# Altium PCB Leningrad_modify.PcbDoc (part 4 of 4)
Units mil, origin at the board's own origin, x right, y up, seen from the top; angles counter-clockwise.
Board outline 10000 x 7310 mil, 2 copper layers (Top Layer, Bottom Layer); 250 components, 267 nets, 1381 pads, 472 vias.
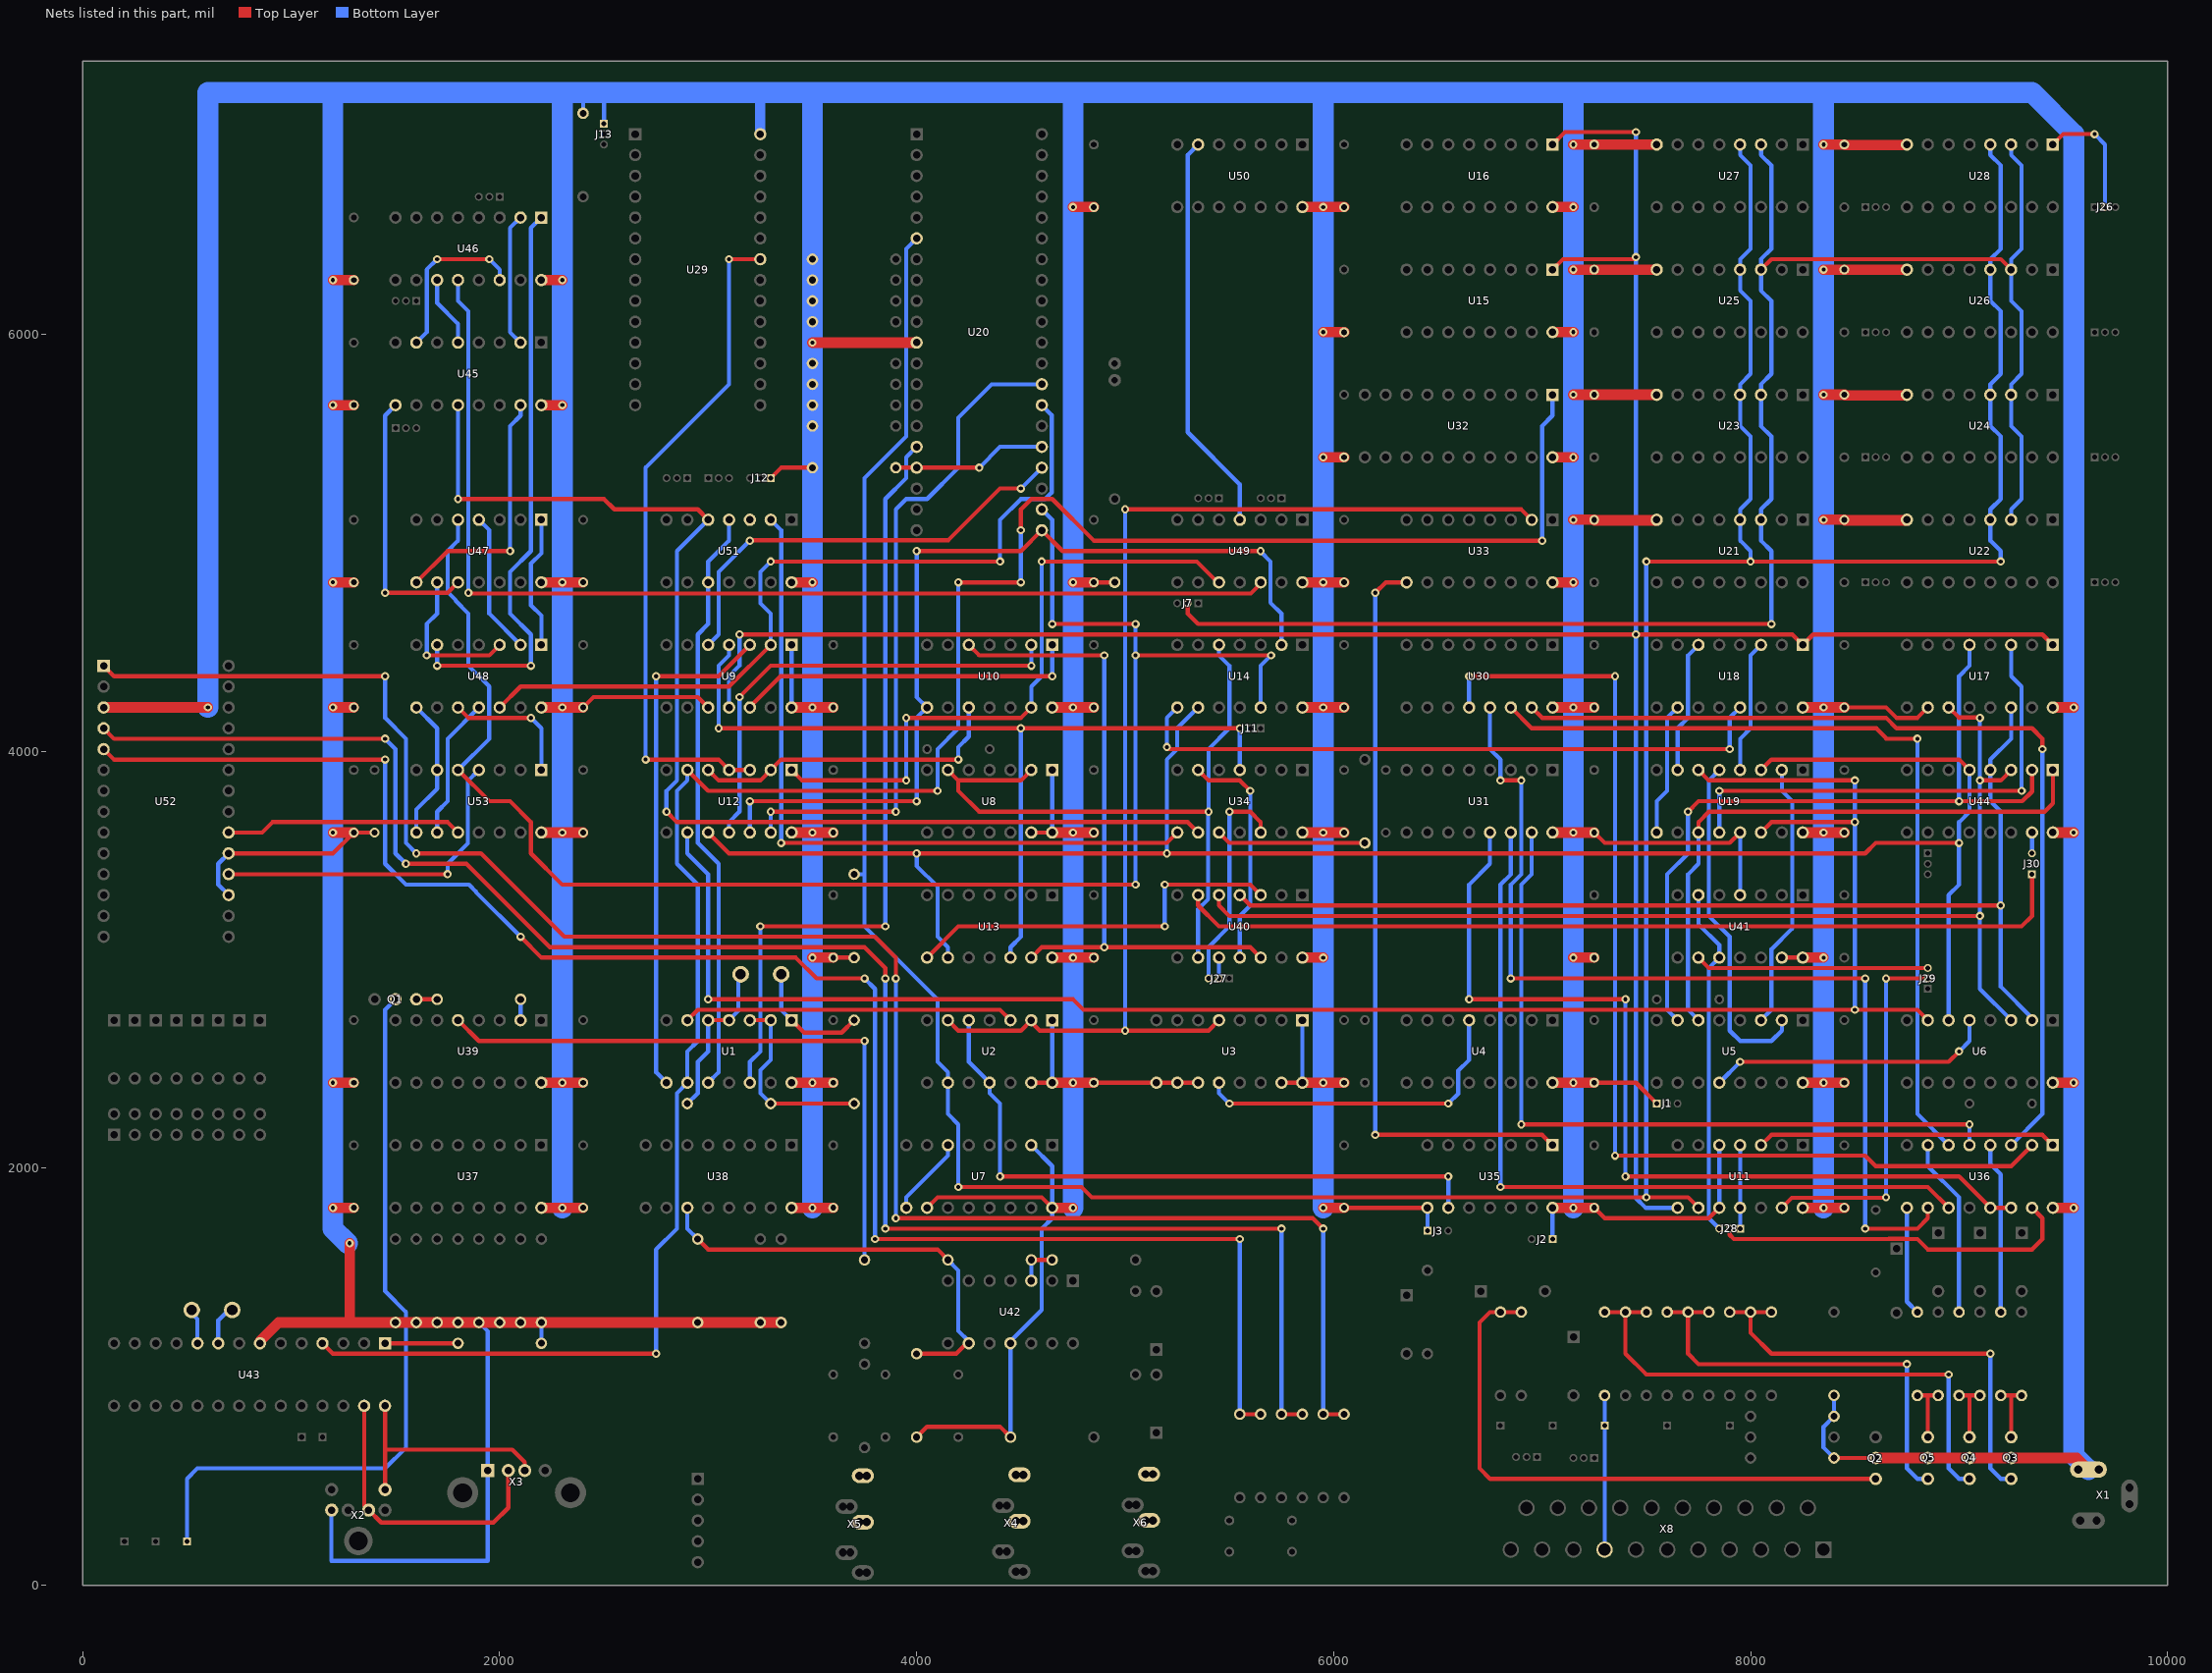
[diagram p3: the nets of this part, all layers, seen from the top]

## Via types
v1: diameter 39.37, hole 19.68, Top Layer to Bottom Layer, tented both sides, 472 vias

## Nets (pads, with @x,y where several pads share a name; then routed paths per layer and width w, separated by ;. In a path a pad name is that pad's centre, name@x,y a point inside that pad or via, vN(x,y) a via of type N, cw(c..) or ccw(c..) an arc to the next point about the centre after c; other vN are vias at no path point) (continued)
NetJ26_2: J26.2 U28.1 | length 601.4
  Top Layer w20: U28.1@9460,6910 U28.1@9450,6910 9500,6960 v1(9650,6960)
  Bottom Layer w20: v1(9650,6960) 9700,6910 J26.2@9700,6610
NetJ27_2: J27.2 U40.10 | length 100
  Bottom Layer w20: J27.2@5450,2910 U40.10@5450,3010
NetJ27_3: J27.3 U34.12 | length 1062.1
  Top Layer w20: v1(5500,3710) 5600,3710 5650,3660 U34.12@5650,3610
  Bottom Layer w20: J27.3@5400,2910 5400,3060 5500,3160 v1(5500,3710)
NetJ28_1: J28.1 U11.4 U11.11 | length 400
  Bottom Layer w20: J28.1@7950,1710 U11.11@7950,1810 U11.4@7950,2110
NetJ28_2: J28.2 U36.15 | length 1751.3
  Top Layer w20: J28.2@7900,1710 7900,1680 7920,1660 8661.95,1660 8663.02,1661.07 8736.98,1661.07 8738.05,1660 8800,1660 8850,1610 9350,1610 9400,1660 9400,1760 U36.15@9350,1810
NetJ28_3: J28.3 U41.6 U41.10 | length 1682.8
  Bottom Layer w20: U41.6@7750,3310 7750,3170 7850,3070 U41.10@7850,3010 7800,2960 7800,1760 J28.3@7850,1710
NetJ29_2: J29.2 U11.13 | length 1770.7
  Top Layer w20: U11.13@8150,1810 8197.53,1857.53 8647.53,1857.53 v1(8650,1860) ; v1(8650,2910) J29.2@8850,2910
  Bottom Layer w20: v1(8650,1860) v1(8650,2910)
NetJ29_3: J29.3 U41.9 | length 1120.7
  Top Layer w20: U41.9@7750,3010 7800,2960 J29.3@8850,2960
NetJ30_1: J30.1 U40.6 | length 4312.1
  Top Layer w20: U40.6@5350,3310 5350,3260 5450,3160 9300,3160 9350,3210 J30.1@9350,3410
NetJ30_3: J30.3 U44.15 | length 100
  Bottom Layer w20: J30.3@9350,3510 U44.15@9350,3610
NetQ1_2: Q1.2 SND.1 | length 3624.3
  Bottom Layer w20: SND.1@500,210 500,510 550,560 1450,560 1550,660 1550,1310 1450,1410 1450,2760 Q1.2@1500,2810
NetQ1_3: Q1.3 R24.2 | length 100
  Top Layer w20: Q1.3@1600,2810 R24.2@1700,2810
NetQ2_1: Q2.1 R13.1 R19.2 | length 2841.4
  Top Layer w20: R19.2@6900,1309.76 R13.1@6800,1309.76 6749.76,1309.76 6700,1260 6700,560 6750.24,509.76 Q2.1@8600,509.76
NetQ3_1: Q3.1 R10.1 R18.1 R20.2 | length 2161.9
  Top Layer w20: R10.1@7900,1309.76 R20.2@8000,1309.76 ; R18.1@8100,1309.76 R20.2@8000,1309.76 ; v1(9150,1110) 8100,1110 8000,1210 R20.2@8000,1309.76
  Bottom Layer w20: v1(9150,1110) 9150,560 9200,510 Q3.1@9250,510
NetQ3_3: Q3.3 R7.2 R54.2 | length 299.8
  Top Layer w20: R7.2@9200,909.76 9250,909.76 ; Q3.3@9250,710 9250,909.76 ; R54.2@9300,909.76 9250,909.76
NetQ4_1: Q4.1 R11.1 R17.1 R21.2 | length 2561.9
  Top Layer w20: R11.1@7300,1309.76 R21.2@7400,1309.76 ; R17.1@7500,1309.76 R21.2@7400,1309.76 ; v1(8950,1010) 7500,1010 7400,1110 R21.2@7400,1309.76
  Bottom Layer w20: v1(8950,1010) 8950,560 9000,510 Q4.1@9050,510
NetQ4_3: Q4.3 R8.2 R53.2 | length 299.8
  Top Layer w20: R8.2@9000,909.76 9050,909.76 ; Q4.3@9050,710 9050,909.76 ; R53.2@9100,909.76 9050,909.76
NetQ5_1: Q5.1 R12.1 R16.1 R22.2 | length 2091.2
  Top Layer w20: R12.1@7600,1309.76 R22.2@7700,1309.76 ; R16.1@7800,1309.76 R22.2@7700,1309.76 ; v1(8750,1060) 7750,1060 7700,1110 R22.2@7700,1309.76
  Bottom Layer w20: v1(8750,1060) 8750,560 8800,510 Q5.1@8850,510
NetQ5_3: Q5.3 R9.2 R55.2 | length 299.8
  Top Layer w20: R9.2@8800,909.76 8850,909.76 ; Q5.3@8850,710 8850,909.76 ; R55.2@8900,909.76 8850,909.76
NetR1_1: R1.1 U1.1 Y1.1 | length 590.4
  Top Layer w20: U1.1@3400,2710 3460,2650 3640,2650 R1.1@3700,2710
  Bottom Layer w20: Y1.1@3350,2930 3350,2760 U1.1@3400,2710
NetR1_2: R1.2 R2.1 U1.2 U1.3 | length 941.4
  Top Layer w20: U1.3@3200,2710 U1.2@3300,2710 ; R2.1@3300,2310 R1.2@3700,2310
  Bottom Layer w20: R2.1@3300,2310 3250,2360 3250,2470 3300,2520 U1.2@3300,2710
NetR2_2: R2.2 U1.4 U1.5 Y1.2 | length 784.6
  Top Layer w20: U1.5@3000,2710 U1.4@3100,2710
  Bottom Layer w20: R2.2@2900,2310 2950,2360 2950,2510 3000,2560 U1.5@3000,2710 ; U1.4@3100,2710 3145,2755 3145,2919 Y1.2@3156,2930
NetR6_1: R6.1 U20.17 U20.25 | length 741.4
  Top Layer w20: R6.1@3900,5360 U20.17@4000,5360 v1(4300,5360)
  Bottom Layer w20: v1(4300,5360) 4400,5460 U20.25@4600,5460
NetR7_1: R7.1 U36.4 | length 820.9
  Bottom Layer w20: U36.4@9150,2110 9150,2020 9200,1970 R7.1@9200,1309.76
NetR8_1: R8.1 U36.7 | length 862.4
  Bottom Layer w20: U36.7@8850,2110 8850,2010 9000,1860 R8.1@9000,1309.76
NetR9_1: R9.1 U36.9 | length 520.9
  Bottom Layer w20: U36.9@8750,1810 8750,1359.76 R9.1@8800,1309.76
NetR11_2: R11.2 R.1 X8.15 | length 739.8
  Bottom Layer w20: X8.15@7300,170 R.1@7300,765 R11.2@7300,909.76
NetR24_1: R24.1 U39.2 | length 100
  Bottom Layer w20: U39.2@2100,2710 R24.1@2100,2810
NetR25_2: R25.2 U34.10 | length 720.7
  Top Layer w20: U34.10@5450,3610 5500,3560 R25.2@6150,3560
NetR31_1: R31.1 U39.5 | length 3041.4
  Top Layer w20: U39.5@1800,2710 1900,2610 v1(3750,2610)
  Bottom Layer w20: R31.1@3750,1560 v1(3750,2610)
NetR45_1: R45.1 R51.2 U42.3 | length 190
  Top Layer w20: R51.2@4550,1560 R45.1@4650,1560
  Bottom Layer w20: U42.3@4550,1470 R51.2@4550,1560
NetR52_1: R52.1 U43.1 | length 350
  Top Layer w20: U43.1@1450,1160 R52.1@1800,1160
NetR57_1: R57.1 R58.1 U52.5 | length 8361.2
  Top Layer w20: U52.5@100,4010 150,3960 v1(1450,3960) ; v1(2100,3110) 2200,3010 3420,3010 3520,2910 v1(3750,2910) ; v1(3800,1660) v1(5550,1660) ; R57.1@5550,820 R58.1@5650,820
  Bottom Layer w20: v1(1450,3960) 1450,3460 1550,3360 1853.29,3360 1887.69,3325.61 1887.69,3322.31 v1(2100,3110) ; v1(3750,2910) 3800,2860 v1(3800,1660) ; R57.1@5550,820 v1(5550,1660)
NetR59_1: R59.1 R60.2 U52.4 | length 8659.2
  Top Layer w20: U52.4@100,4110 150,4060 v1(1450,4060) ; v1(1550,3460) 1840,3460 2240,3060 3750,3060 3850,2960 v1(3850,2910) ; v1(3850,1710) v1(5750,1710) ; R60.2@5750,820 R59.1@5850,820
  Bottom Layer w20: v1(1450,4060) 1500,4010 1500,3510 v1(1550,3460) ; v1(3850,1710) v1(3850,2910) ; R60.2@5750,820 v1(5750,1710)
NetR61_1: R61.1 R62.2 U52.1 | length 9100.7
  Top Layer w20: U52.1@100,4410 150,4360 v1(1450,4360) ; v1(1600,3510) 1910,3510 2310,3110 3800,3110 3900,3010 v1(3900,2910) ; v1(3900,1760) 5900,1760 v1(5950,1710) ; R61.1@5950,820 R62.2@6050,820
  Bottom Layer w20: v1(1450,4360) 1450,4160 1550,4060 1550,3560 v1(1600,3510) ; v1(3900,1760) v1(3900,2910) ; R61.1@5950,820 v1(5950,1710)
NetU1_6: U1.6 U2.3 | length 1591.4
  Top Layer w20: U1.6@2900,2710 2950,2760 4400,2760 U2.3@4450,2710
NetU1_8: U1.8 U9.3 | length 2482.8
  Top Layer w20: v1(2750,4360) 3050,4360 U9.3@3200,4510
  Bottom Layer w20: v1(2750,4360) 2750,2460 U1.8@2800,2410
NetU1_9: U1.9 U12.6 U32.1 U43.4 | length 10822.8
  Top Layer w20: U43.4@1150,1160 1200,1110 v1(2750,1110) ; U12.6@2900,3910 3000,3810 v1(4100,3810) ; v1(4200,4810) v1(4500,4810) ; v1(4500,5060) 4500,5160 4550,5210 4650,5210 4850,5010 v1(7000,5010)
  Bottom Layer w20: v1(2750,1110) 2750,1610 2850,1710 2850,2360 U1.9@2900,2410 2900,2560 2950,2610 2950,3360 2850,3460 2850,3810 2900,3860 U12.6@2900,3910 ; v1(4100,3810) 4100,4010 4200,4110 v1(4200,4810) ; v1(4500,4810) v1(4500,5060) ; v1(7000,5010) 7000,5560 7050,5610 U32.1@7050,5710
NetU1_10: U1.10 U51.4 U51.10 | length 2824.3
  Bottom Layer w20: U1.10@3000,2410 3050,2460 3050,3460 2950,3560 2950,4560 3000,4610 U51.10@3000,4810 3000,4910 3100,5010 U51.4@3100,5110
NetU1_12: U1.12 U20.16 | length 3732.8
  Top Layer w20: v1(3250,3160) v1(3850,3160)
  Bottom Layer w20: U1.12@3200,2410 3200,2510 3250,2560 v1(3250,3160) ; v1(3850,3160) 3850,5210 3950,5310 3950,5410 U20.16@4000,5460
NetU2_5: U2.5 U2.11 U35.9 | length 3112.1
  Top Layer w20: v1(4400,1960) v1(6550,1960)
  Bottom Layer w20: U2.5@4250,2710 4250,2510 U2.11@4350,2410 4350,2360 4400,2310 v1(4400,1960) ; U35.9@6550,1810 v1(6550,1960)
NetU3_12: U3.12 U4.5 | length 1612.1
  Top Layer w20: v1(5500,2310) v1(6550,2310)
  Bottom Layer w20: U3.12@5450,2410 5450,2360 v1(5500,2310) ; v1(6550,2310) 6597.53,2357.53 6597.53,2467.53 6650,2520 U4.5@6650,2710
NetU5_12: U5.12 U6.5 | length 1402.8
  Top Layer w20: v1(7950,2510) 8950,2510 v1(9000,2560)
  Bottom Layer w20: U5.12@7850,2420 U5.12@7850,2410 v1(7950,2510) v1@7940,2510 ; v1(9000,2560) 9050,2610 U6.5@9050,2710
NetU7_6: U7.6 U7.9 | length 382.8
  Bottom Layer w20: U7.9@3950,1810 3950,1860 4150,2060 U7.6@4150,2110
NetU8_2: U8.2 U8.6 U14.5 U40.9 | length 3315.7
  Top Layer w20: U8.6@4150,3910 4200,3860 ; U8.2@4550,3910 4500,3860 4200,3860 ; v1(5400,3710) 4300,3710 4200,3810 4200,3860
  Bottom Layer w20: U40.9@5350,3010 5350,3242.79 5397.53,3290.31 5397.53,3707.53 v1(5400,3710) 5400,4010 5500,4110 5500,4410 5450,4460 U14.5@5450,4510
NetU9_2: U9.2 U20.27 U48.12 | length 3906.6
  Top Layer w20: U48.12@2000,4210 2100,4310 3100,4310 U9.2@3300,4510 ; v1(3300,4910) v1(4400,4910)
  Bottom Layer w20: U9.2@3300,4510 3300,4660 3250,4710 3250,4860 v1(3300,4910) ; v1(4400,4910) 4400,5110 4500,5210 4617.21,5210 4647.53,5240.31 4647.53,5612.47 U20.27@4600,5660
NetU9_5: U9.5 U20.24 | length 2127.8
  Top Layer w20: v1(3200,5010) 3202.47,5012.47 4152.47,5012.47 4400,5260 v1(4500,5260)
  Bottom Layer w20: U9.5@3000,4510 3050,4560 3050,4860 v1(3200,5010) ; v1(4500,5260) U20.24@4600,5360
NetU9_12: U9.12 U10.1 | length 1664.1
  Top Layer w20: U9.12@3200,4210 3200,4213.29 3346.71,4360 v1(4650,4360)
  Bottom Layer w20: v1(4650,4360) U10.1@4650,4510
NetU10_2: U10.2 U12.11 | length 2232.8
  Top Layer w20: v1(3150,4260) 3300,4410 v1(4550,4410)
  Bottom Layer w20: U12.11@3100,3610 3100,3660 3150,3710 v1(3150,4260) ; v1(4550,4410) U10.2@4550,4510
NetU10_5: U10.5 U13.13 U40.12 | length 3212.1
  Top Layer w20: U10.5@4250,4510 4300,4460 v1(4900,4460) ; U13.13@4550,3010 4600,3060 v1(4900,3060) 5600,3060 U40.12@5650,3010
  Bottom Layer w20: v1(4900,3060) v1(4900,4460)
NetU10_10: U10.10 U12.2 U12.5 | length 1532.8
  Top Layer w20: U12.5@3000,3910 3050,3860 3250,3860 U12.2@3300,3910 3350,3960 v1(4200,3960)
  Bottom Layer w20: v1(4200,3960) 4200,4020 4250,4070 U10.10@4250,4210
NetU10_13: U10.13 U12.1 U49.10 | length 3106
  Top Layer w20: U12.1@3400,3910 3450,3860 v1(3950,3860) ; v1(3950,4160) 4500,4160 U10.13@4550,4210 ; v1(4600,4910) 5344.09,4910 U49.10@5450,4804.09
  Bottom Layer w20: v1(3950,3860) v1(3950,4160) ; U10.13@4550,4210 4550,4310 4600,4360 v1(4600,4910)
NetU11_3: U11.3 U36.1 | length 1441.4
  Top Layer w20: U11.3@8050,2110 8100,2160 9400,2160 U36.1@9450,2110
NetU12_3: U12.3 U12.4 U29.22 | length 3236.4
  Top Layer w20: v1(2700,3960) 3050,3960 U12.4@3100,3910 U12.3@3200,3910 ; v1(3100,6360) U29.22@3250,6360
  Bottom Layer w20: v1(2700,3960) 2700,5360 3100,5760 v1(3100,6360)
NetU12_13: U12.13 U20.28 | length 3239.1
  Top Layer w20: v1(3300,3710) v1(3900,3710)
  Bottom Layer w20: U12.13@3300,3610 v1(3300,3710) ; v1(3900,3710) 3900,5160 3950,5210 4050,5210 4200,5360 4200,5600 4360,5760 U20.28@4600,5760
NetU13_8: U13.8 U40.3 | length 1882.8
  Top Layer w20: U13.8@4050,3010 4200,3160 v1(5190,3160) ; v1(5190,3360) 5600,3360 U40.3@5650,3310
  Bottom Layer w20: v1(5190,3160) v1(5190,3360)
NetU14_8: U14.8 U18.13 | length 3135.6
  Top Layer w20: v1(5200,4020) 5210,4010 v1(7900,4010)
  Bottom Layer w20: v1(5200,4020) 5200,4160 U14.8@5250,4210 ; v1(7900,4010) 7900,4160 U18.13@7950,4210
NetU17_3: U17.3 U19.12 | length 2370.7
  Top Layer w20: v1(7850,3810) v1(9300,3810)
  Bottom Layer w20: U19.12@7850,3610 v1(7850,3810) ; U17.3@9250,4510 9250,4360 9300,4310 v1(9300,3810)
NetU18_3: U18.3 U19.4 | length 641.4
  Bottom Layer w20: U19.4@7950,3910 7950,4060 8000,4110 8000,4460 U18.3@8050,4510
NetU18_6: U18.6 U19.7 | length 641.4
  Bottom Layer w20: U19.7@7650,3910 7650,4110 7700,4160 7700,4460 U18.6@7750,4510
NetU18_10: U18.10 U19.9 | length 641.4
  Bottom Layer w20: U19.9@7550,3610 7550,3760 7600,3810 7600,4160 U18.10@7650,4210
NetU30_12: U30.12 U36.2 | length 5212.1
  Top Layer w20: v1(6650,4360) v1(7350,4360) ; v1(7350,2060) 8550,2060 8600,2010 9250,2010 U36.2@9350,2110
  Bottom Layer w20: U30.12@6650,4210 v1(6650,4360) ; v1(7350,2060) v1(7350,4360)
NetU30_13: U30.13 U36.10 | length 4712.1
  Top Layer w20: v1(6800,3860) v1(6900,3860) ; v1(6850,2910) v1(8550,2910) ; v1(8550,1710) 8800,1710 8850,1760 U36.10@8850,1810
  Bottom Layer w20: U30.13@6750,4210 6750,4010 6800,3960 v1(6800,3860) ; v1(6850,2910) 6850,3360 6900,3410 v1(6900,3860) ; v1(8550,1710) v1(8550,2910)
NetU30_14: U30.14 U36.6 | length 4026.2
  Top Layer w20: U30.14@6850,4210 6950,4110 8603.29,4110 8650,4063.29 8650,4060 v1(8800,4060)
  Bottom Layer w20: v1(8800,4060) 8800,2260 U36.6@8950,2110
NetU30_15: U30.15 U36.3 | length 4524.3
  Top Layer w20: U30.15@6950,4210 7000,4160 8650,4160 8700,4110 9350,4110 9400,4060 v1(9400,4010)
  Bottom Layer w20: U36.3@9250,2110 9400,2260 v1(9400,4010)
NetU31_13: U31.13 U36.13 U36.14 | length 4353.6
  Top Layer w20: v1(6650,2810) v1(7400,2810) ; v1(7400,1960) 9000,1960 U36.13@9150,1810 U36.14@9250,1810
  Bottom Layer w20: v1(6650,2810) 6650,3360 6750,3460 U31.13@6750,3610 ; v1(7400,1960) v1(7400,2810)
NetU31_14: U31.14 U36.11 | length 3912.1
  Top Layer w20: v1(6800,1910) 8850,1910 U36.11@8950,1810
  Bottom Layer w20: v1(6800,1910) 6800,3360 6850,3410 U31.14@6850,3610
NetU31_15: U31.15 U36.5 | length 3670.7
  Top Layer w20: v1(6900,2210) v1(9050,2210)
  Bottom Layer w20: v1(6900,2210) 6900,3360 6950,3410 U31.15@6950,3610 ; U36.5@9050,2110 v1(9050,2210)
NetU33_9: U33.9 U35.1 | length 3641.3
  Top Layer w20: v1(6200,2160) 7000,2160 U35.1@7050,2110 ; v1(6200,4760) 6249.76,4809.76 U33.9@6350,4809.76
  Bottom Layer w20: v1(6200,2160) v1(6200,4760)
NetU34_6: U34.6 U40.11 | length 1112.1
  Top Layer w20: U34.6@5350,3910 5400,3860 5550,3860 v1(5600,3810)
  Bottom Layer w20: U40.11@5550,3010 5550,3210 5600,3260 v1(5600,3810)
NetU34_8: U34.8 U51.2 | length 3491.4
  Top Layer w20: v1(3350,3560) 5200,3560 U34.8@5250,3610
  Bottom Layer w20: U51.2@3300,5110 3350,5060 v1(3350,3560)
NetU34_9: U34.9 U45.12 U51.5 | length 5765.7
  Top Layer w20: v1(1800,5210) 2500,5210 2550,5160 2950,5160 U51.5@3000,5110 ; v1(2800,3710) 2850,3660 5300,3660 U34.9@5350,3610
  Bottom Layer w20: v1(1800,5210) U45.12@1800,5660 ; v1(2800,3710) 2800,3810 2850,3860 2850,4960 U51.5@3000,5110
NetU43_9: U43.9 Y2.1 | length 170.7
  Bottom Layer w20: U43.9@650,1170 650,1270 Y2.1@700,1320
NetU43_10: U43.10 Y2.2 | length 168.2
  Bottom Layer w20: Y2.2@506,1320 550,1276 U43.10@550,1170
NetU43_27: U43.27 X2.1 X3.2 | length 1443.2
  Top Layer w20: U43.27@1350,860 1350,381.26 X2.1@1371.26,360 1431.26,300 1970,300 2041.26,371.26 X3.2@2041.26,550 X3.2@2041.26,561.26
  Bottom Layer w20: U43.27@1350,860 U43.27@1350,880
NetU43_28: U43.28 X2.5 X3.3 | length 1156.4
  Top Layer w20: X2.5@1450,458.43 1450,650 ; U43.28@1450,860 1450,650 ; X3.3@2130,550 X3.3@2120,550 2120,590 2060,650 1450,650
  Bottom Layer w20: U43.28@1450,870 U43.28@1450,880
NetU45_2: U45.2 U46.2 | length 641.4
  Bottom Layer w20: U45.2@2100,5960 2050,6010 2050,6510 U46.2@2100,6560
NetU45_5: U45.5 U46.11 | length 341.4
  Bottom Layer w20: U46.11@1700,6260 1700,6150 1800,6050 U45.5@1800,5960
NetU45_7: U45.7 U46.14 | length 812.1
  Top Layer w20: v1(1700,6360) v1(1950,6360)
  Bottom Layer w20: U45.7@1600,5960 1650,6010 1650,6310 v1(1700,6360) ; v1(1950,6360) 2000,6310 U46.14@2000,6260
NetU45_9: U45.9 U47.10 | length 1291.4
  Top Layer w20: v1(1450,4760) 1750,4760 U47.10@1800,4810
  Bottom Layer w20: v1(1450,4760) 1450,5610 U45.9@1500,5660
NetU45_15: U45.15 U47.8 | length 1232.8
  Top Layer w20: U47.8@1600,4810 1750,4960 v1(2050,4960)
  Bottom Layer w20: v1(2050,4960) 2050,5560 2100,5610 U45.15@2100,5660
NetU46_1: U46.1 U48.6 | length 2803.6
  Top Layer w20: v1(1700,4410) v1(2150,4410)
  Bottom Layer w20: v1(1700,4410) U48.6@1700,4510 ; v1(2150,4410) 2150,4560 2050,4660 2050,4860 2150,4960 2150,6510 U46.1@2200,6560
NetU46_12: U46.12 U49.12 | length 5341.8
  Top Layer w20: v1(1850,4760) 1853.43,4756.57 5602.47,4756.57 U49.12@5650,4804.09
  Bottom Layer w20: U46.12@1800,6260 1800,6160 1850,6110 v1(1850,4760)
NetU47_1: U47.1 U48.1 | length 641.4
  Bottom Layer w20: U48.1@2200,4510 2200,4650 2150,4700 2150,4900 2200,4950 U47.1@2200,5110
NetU47_4: U47.4 U48.2 | length 682.8
  Bottom Layer w20: U47.4@1900,5110 1950,5060 1950,4660 U48.2@2100,4510
NetU47_9: U47.9 U48.3 | length 741.4
  Top Layer w20: v1(1650,4460) 1950,4460 U48.3@2000,4510
  Bottom Layer w20: v1(1650,4460) 1650,4610 1700,4660 U47.9@1700,4810
NetU48_8: U48.8 U53.6 U53.8 | length 682.8
  Bottom Layer w20: U53.8@1600,3610 1600,3720 1700,3820 U53.6@1700,3910 1700,4110 U48.8@1600,4210
NetU48_10: U48.10 U53.1 | length 641.4
  Top Layer w20: U48.10@1800,4210 1850,4160 v1(2150,4160)
  Bottom Layer w20: v1(2150,4160) 2200,4110 U53.1@2200,3910
NetU48_11: U48.11 U53.9 | length 682.8
  Bottom Layer w20: U53.9@1700,3610 1700,3710 1750,3760 1750,4060 U48.11@1900,4210
NetU49_4: U49.4 U50.6 | length 1930.2
  Bottom Layer w20: U50.6@5350,6910 5300,6860 5300,5530 5550,5280 U49.4@5550,5104.09
NetU51_3: U51.3
NetU52_18: U52.18 U53.4 | length 1612.1
  Top Layer w20: U52.18@700,3410 v1(1750,3410)
  Bottom Layer w20: v1(1750,3410) 1750,3460 1847.53,3557.53 1847.53,3857.53 U53.4@1900,3910
NetU52_20: U52.20 U53.10 | length 1141.4
  Top Layer w20: U52.20@700,3610 860,3610 910,3660 1750,3660 U53.10@1800,3610
NetX4_3: X4.3 X4.3A X4.3B
NetX4_5: X4.5 X4.5A X4.5B
NetX5_3: X5.3 X5.3A X5.3B
NetX5_5: X5.5 X5.5A X5.5B
NetX6_3: X6.3 X6.3A X6.3B
NetX6_5: X6.5 X6.5A X6.5B
R\A\S\: R3.1 U2.9 U11.9 U20.6 U21.4 U22.4 U23.4 U24.4 U25.4 U26.4 U27.4 U28.4 | length 17521.3
  Top Layer w20: v1(4200,1910) 4790,1910 4840,1860 v1(7500,1860) 7700,1860 U11.9@7750,1810 ; v1(7500,4910) v1(8000,4910) v1(9200,4910)
  Bottom Layer w20: R3.1@3700,3410 3750,3410 ; U20.6@4000,6460 3950,6410 3950,5510 3750,5310 3750,3410 ; v1(4200,1910) 4200,2210 4150,2260 U2.9@4150,2410 4150,2460 4100,2510 4100,2810 3750,3160 3750,3410 ; v1(7500,1860) v1(7500,4910) ; U27.4@7950,6910 7950,6860 8000,6810 8000,6410 7950,6360 U25.4@7950,6310 7950,6210 8000,6160 8000,5810 7950,5760 U23.4@7950,5710 7950,5560 8000,5510 8000,5210 7950,5160 U21.4@7950,5110 7950,5010 8000,4960 v1(8000,4910) ; U28.4@9150,6910 9150,6860 9200,6810 9200,6410 9150,6360 U26.4@9150,6310 9150,6160 9200,6110 9200,5810 9150,5760 U24.4@9150,5710 9150,5560 9200,5510 9200,5210 9150,5160 U22.4@9150,5110 9150,5010 9200,4960 v1(9200,4910)
R\D\: U10.8 U12.12 U14.2 U20.21 | length 4415.7
  Top Layer w20: v1(3200,3760) v1(4000,3760) ; v1(4000,4960) 4500,4960 U20.21@4600,5060 4700,4960 v1(5650,4960)
  Bottom Layer w20: U12.12@3200,3610 v1(3200,3760) ; v1(4000,3760) 4000,4160 U10.8@4050,4210 4000,4260 v1(4000,4960) ; v1(5650,4960) 5650,4957.53 5697.53,4910 5697.53,4712.47 5750,4660 U14.2@5750,4510
RAS: U9.11 U11.8 U15.1 U16.1 U17.1 U18.1 | length 12915.2
  Top Layer w20: v1(3150,4560) v1(7450,4560) 8200,4560 U18.1@8250,4510 8300,4560 9400,4560 U17.1@9450,4510 ; U15.1@7050,6310 7100,6360 7440,6360 v1(7450,6370) ; U16.1@7050,6910 7110,6970 v1(7450,6970)
  Bottom Layer w20: U9.11@3100,4210 3100,4360 3150,4410 v1(3150,4560) ; v1(7450,6970) v1(7450,6370) v1(7450,4560) 7450,1856.71 7496.71,1810 U11.8@7650,1810
T\I\: U2.2 U2.6 U3.5 U33.2 | length 5865.3
  Top Layer w20: U2.6@4150,2710 4200,2660 4500,2660 U2.2@4550,2710 4560,2710 4560,2690 4590,2660 v1(5000,2660) 5400,2660 U3.5@5450,2710 ; v1(5000,5160) 5100.24,5159.76 6900,5159.76 U33.2@6950,5109.76
  Bottom Layer w20: v1(5000,2660) v1(5000,5160)
T_IN: R26.1 R50.1 R51.1 U38.11 U42.9 | length 2118.4
  Top Layer w20: R26.1@2950,1660 3000,1610 4100,1610 R51.1@4150,1560 ; R50.1@4000,1110 4190,1110 U42.9@4250,1170
  Bottom Layer w20: U38.11@2900,1810 2900,1710 R26.1@2950,1660 ; R51.1@4150,1560 4200,1510 4200,1220 U42.9@4250,1170
V0: U5.3 U19.2 | length 1282.8
  Bottom Layer w20: U5.3@8050,2710 8100,2760 8100,3050 8200,3150 8200,3760 8150,3810 U19.2@8150,3910
V1: U5.2 U19.5 | length 1653.6
  Bottom Layer w20: U19.5@7850,3910 7800,3860 7800,3210 7900,3110 7900,2660 7950,2610 8100,2610 8150,2660 U5.2@8150,2710
V2: U5.6 U19.11 U44.1 | length 2888.7
  Top Layer w20: U19.11@7750,3610 7750,3660 7800,3710 9410,3710 9450,3750 U44.1@9450,3910
  Bottom Layer w20: U5.6@7750,2710 7700,2760 7700,3410 7750,3460 U19.11@7750,3610
V3: U5.7 U17.5 U44.2 | length 3626.2
  Top Layer w20: v1(7700,3710) 7750,3760 v1(9000,3760) 9303.29,3760 9350,3806.71 U44.2@9350,3910
  Bottom Layer w20: U5.7@7650,2710 7600,2760 7600,3410 7700,3510 v1(7700,3710) ; v1(9000,3760) 9000,4360 9050,4410 U17.5@9050,4510
V4: U6.3 U17.11 U40.5 U44.3 | length 5575.3
  Top Layer w20: U40.5@5450,3310 5450,3260 5500,3210 v1(9100,3210) ; U17.11@8950,4210 9000,4160 9002.47,4162.47 v1@9100,4162.47 ; v1(9100,3860) 9200,3860 U44.3@9250,3910
  Bottom Layer w20: v1(9100,4160) v1(9100,3860) v1(9100,3210) 9100,2860 U6.3@9250,2710
V5: U6.2 U17.14 U40.4 U44.4 | length 5295
  Top Layer w20: U40.4@5550,3310 5600,3260 v1(9200,3260)
  Bottom Layer w20: U17.14@9250,4210 9250,4060 9150,3960 U44.4@9150,3910 9150,3760 9200,3710 v1(9200,3260) 9200,2870 9350,2720 U6.2@9350,2710
V6: U6.6 U12.10 U13.9 U14.9 U19.3 U44.5 | length 9669.2
  Top Layer w20: U12.10@3000,3610 3100,3510 v1(4000,3510) v1(5200,3510) 8550,3510 8600,3560 v1(9000,3560) ; U19.3@8050,3910 8100,3960 9000,3960 U44.5@9050,3910
  Bottom Layer w20: v1(4000,3510) 4000,3450 4100,3350 4100,3110 4150,3060 U13.9@4150,3010 ; v1(5200,3510) 5200,3960 5250,4010 5250,4110 U14.9@5350,4210 ; U6.6@8950,2710 8950,3310 9000,3360 v1(9000,3560) 9000,3660 9050,3710 U44.5@9050,3910
V7: U6.7 U12.9 U19.6 U19.14 | length 9074.3
  Top Layer w20: v1(3000,2810) 4750,2810 4800,2760 v1(8500,2760) 8800,2760 U6.7@8850,2710 ; U19.6@7750,3910 7800,3860 v1(8500,3860) ; U19.14@8050,3610 8100,3660 v1(8500,3660)
  Bottom Layer w20: U12.9@2900,3610 2900,3510 3000,3410 v1(3000,2810) ; v1(8500,2760) v1(8500,3660) v1(8500,3860)
VCC: C3.2 C4.2 C5.2 C6.2 C7.2 C8.2 C9.2 C13.2 C14.2 C15.2 C16.2 C17.2 C18.2 C19.2 C20.2 C21.2 C22.1 C25.1 C26.1 C27.1 C28.2 C29.2 C30.2 C31.2 C32.2 C33.2 C34.2 C35.2 C36.2 C37.2 C38.2 C39.2 C40.2 C41.2 C42.2 C43.2 C44.2 C47.2 C48.2 C51.2 C54.2 C55.2 C56.2 C57.2 C58.2 C59.2 C60.2 C61.2 C62.2 J1.1 J2.1 J3.1 J12.1 J13.1 Q2.2 Q3.2 Q4.2 Q5.2 R3.2 R4.1 R5.1 R6.2 R14.2 R26.2 R27.2 R28.2 R29.2 R30.2 R33.2 R34.2 R35.2 R36.2 R37.2 R38.2 R39.2 R40.2 R41.2 R42.2 R43.2 R44.2 R46.2 R47.2 R48.2 R50.2 R52.2 R56.1 R63.1 U1.14 U2.1 U2.13 U2.14 U3.1 U3.9 U3.10 U3.11 U3.15 U3.16 U4.16 U5.16 U6.16 U7.2 U7.10 U7.16 U8.1 U8.13 U8.14 U9.1 U9.10 U9.14 U10.14 U11.5 U11.10 U11.14 U12.14 U13.14 U14.14 U15.16 U16.16 U17.10 U17.16 U18.16 U19.13 U19.16 U20.11 U21.8 U22.8 U23.8 U24.8 U25.8 U26.8 U27.8 U28.8 U29.28 U30.16 U31.16 U32.20 U33.16 U34.14 U35.8 U35.14 U36.16 U37.16 U38.16 U39.16 U40.14 U41.4 U41.13 U41.14 U42.11 U43.7 U44.16 U45.16 U46.16 U47.14 U48.14 U49.14 U50.14 U51.14 U52.3 U52.17 U52.19 U53.14 X1.1 X1.1A X1.1B X2.4 X3.1 | length 85420.3
  Top Layer w20: U52.19@700,3510 1200,3510 C25.1@1300,3610 C22.1@1400,3610 ; C13.2@2400,4210 2450,4260 2950,4260 U9.10@3000,4210 ; J12.1@3300,5310 3350,5360 R6.2@3500,5360 ; C16.2@3600,3010 R3.2@3700,3010 ; R50.2@4000,710 4050,760 4400,760 R46.2@4450,710 ; U7.10@4050,1810 4100,1860 4600,1860 U7.16@4650,1810 ; U2.13@4550,2410 U2.14@4650,2410 ; U8.13@4550,3610 U8.14@4650,3610 ; C5.2@4850,2410 U3.9@5150,2410 U3.10@5250,2410 U3.11@5350,2410 ; C20.2@4850,4810 R5.1@4950,4810 ; U3.15@5750,2410 U3.16@5850,2410 ; C59.2@6050,1810 U35.8@6450,1810 ; C9.2@7250,1810 7300,1760 7800,1760 U11.10@7850,1810 ; C6.2@7250,2410 7450,2410 J1.1@7550,2310 ; C33.2@7250,3610 7300,3560 7900,3560 U19.13@7950,3610 ; U41.13@8150,3010 U41.14@8250,3010 ; R63.1@8400,610 8400.24,609.76 Q2.2@8600,609.76 ; C34.2@8450,4210 8650,4210 8700,4160 8800,4160 U17.10@8850,4210
  Top Layer w50: U52.3@100,4210 v1(600,4210) ; U43.7@850,1160 850,1170 940,1260 1280,1260 ; v1(1200,1810) C30.2@1300,1810 ; v1(1200,2410) C29.2@1300,2410 ; v1(1200,3610) C25.1@1300,3610 ; v1(1200,4210) C39.2@1300,4210 ; v1(1200,4810) C38.2@1300,4810 ; v1(1200,5660) C36.2@1300,5660 ; v1(1200,6260) C37.2@1300,6260 ; v1(1280,1640) 1280,1260 ; U37.16@2200,1810 v1(2300,1810) C28.2@2400,1810 ; U39.16@2200,2410 v1(2300,2410) C3.2@2400,2410 ; U53.14@2200,3610 v1(2300,3610) C15.2@2400,3610 ; U48.14@2200,4210 v1(2300,4210) C13.2@2400,4210 ; U47.14@2200,4810 v1(2300,4810) C27.1@2400,4810 ; U45.16@2200,5660 v1(2300,5660) ; U46.16@2200,6260 v1(2300,6260) ; R33.2@3350,1260 R44.2@3250,1260 R26.2@2950,1260 R27.2@2200,1260 R36.2@2100,1260 R30.2@2000,1260 R42.2@1900,1260 R28.2@1800,1260 R38.2@1700,1260 R29.2@1600,1260 R40.2@1500,1260 1280,1260 ; U38.16@3400,1810 v1(3500,1810) C55.2@3600,1810 ; U1.14@3400,2410 v1(3500,2410) C4.2@3600,2410 ; U12.14@3400,3610 v1(3500,3610) C57.2@3600,3610 ; U9.14@3400,4210 v1(3500,4210) C14.2@3600,4210 ; U51.14@3400,4810 v1(3500,4810) ; v1(3500,3010) C16.2@3600,3010 ; v1(3500,5960) U20.11@4000,5960 ; U7.16@4650,1810 v1(4750,1810) ; U2.14@4650,2410 v1(4750,2410) C5.2@4850,2410 ; U13.14@4650,3010 v1(4750,3010) C19.2@4850,3010 ; U8.14@4650,3610 v1(4750,3610) C18.2@4850,3610 ; U10.14@4650,4210 v1(4750,4210) C17.2@4850,4210 ; v1(4750,4810) C20.2@4850,4810 ; v1(4750,6610) C21.2@4850,6610 ; U3.16@5850,2410 v1(5950,2410) C7.2@6050,2410 ; U40.14@5850,3010 v1(5950,3010) ; U34.14@5850,3610 v1(5950,3610) C58.2@6050,3610 ; U14.14@5850,4210 v1(5950,4210) C62.2@6050,4210 ; U49.14@5850,4810 v1(5950,4810) C60.2@6050,4810 ; U50.14@5850,6610 v1(5950,6610) C31.2@6050,6610 ; v1(5950,1810) C59.2@6050,1810 ; v1(5950,5410) C26.1@6050,5410 ; v1(5950,6010) C32.2@6050,6010 ; U35.14@7050,1810 v1(7150,1810) C9.2@7250,1810 ; U4.16@7050,2410 v1(7150,2410) C6.2@7250,2410 ; U31.16@7050,3610 v1(7150,3610) C33.2@7250,3610 ; U30.16@7050,4210 v1(7150,4210) C35.2@7250,4210 ; U33.16@7050,4810 v1(7150,4810) ; U32.20@7050,5410 v1(7150,5410) ; U15.16@7050,6010 v1(7150,6010) ; U16.16@7050,6610 v1(7150,6610) ; v1(7150,3010) C56.2@7250,3010 ; v1(7150,5110) C41.2@7250,5110 7252.69,5107.31 7547.31,5107.31 U21.8@7550,5110 ; v1(7150,5710) C47.2@7250,5710 U23.8@7550,5710 ; v1(7150,6310) C42.2@7250,6310 U25.8@7550,6310 ; v1(7150,6910) C43.2@7250,6910 U27.8@7550,6910 ; U11.14@8250,1810 v1(8350,1810) C61.2@8450,1810 ; U5.16@8250,2410 v1(8350,2410) C8.2@8450,2410 ; U41.14@8250,3010 v1(8350,3010) ; U19.16@8250,3610 v1(8350,3610) C54.2@8450,3610 ; U18.16@8250,4210 v1(8350,4210) C34.2@8450,4210 ; v1(8350,5110) C40.2@8450,5110 8452.69,5107.31 8747.31,5107.31 U22.8@8750,5110 ; v1(8350,5710) C44.2@8450,5710 8452.69,5707.31 8747.31,5707.31 U24.8@8750,5710 ; v1(8350,6310) C51.2@8450,6310 U26.8@8750,6310 ; v1(8350,6910) C48.2@8450,6910 8452.69,6907.31 8747.31,6907.31 U28.8@8750,6910 ; Q2.2@8600,609.76 8600.24,610 Q5.2@8850,610 Q4.2@9050,610 Q3.2@9250,610 9564.72,610 X1.1@9620.63,554.09 ; U36.16@9450,1810 v1(9550,1810) ; U6.16@9450,2410 v1(9550,2410) ; U44.16@9450,3610 v1(9550,3610) ; U17.16@9450,4210 v1(9550,4210)
  Bottom Layer w20: U52.17@700,3310 650,3360 650,3460 U52.19@700,3510 ; X2.4@1194.09,360 1192.83,358.74 1192.83,117.17 1942.83,117.17 X3.1@1942.83,550 1942.83,1217.17 R42.2@1900,1260 ; R52.2@2200,1160 R27.2@2200,1260 ; R56.1@2400,7060 2400,7160 ; J13.1@2500,7010 2500,7110 ; U9.14@3400,4210 U9.1@3400,4510 ; R46.2@4450,710 U42.11@4450,1160 4450,1170 4600,1320 4600,1710 4650,1760 U7.16@4650,1810 4650,2010 U7.2@4550,2110 ; U2.14@4650,2410 U2.1@4650,2710 ; U8.14@4650,3610 U8.1@4650,3910 ; U3.16@5850,2410 U3.1@5850,2710 ; J3.1@6450,1700 U35.8@6450,1810 ; J2.1@7050,1660 U35.14@7050,1810 ; U11.10@7850,1810 U11.5@7850,2110 ; U41.4@7950,3310 U19.13@7950,3610 ; R63.1@8400,610 8350,660 8350,759.76 R14.2@8400,809.76 R4.1@8400,910
  Bottom Layer w50: U29.28@3250,6960 3250,7110
  Bottom Layer w100: v1(600,4210) 600,7160 2300,7160 ; 1200,7110 v1(1200,6260) v1(1200,5660) v1(1200,4810) v1(1200,4210) v1(1200,3610) v1(1200,2410) v1(1200,1810) 1200,1710 v1@1270,1640 ; v1(2300,1810) v1(2300,2410) v1(2300,3610) v1(2300,4210) v1(2300,4810) v1(2300,5660) v1(2300,6260) 2300,7160 ; v1(3500,1810) v1(3500,2410) v1(3500,3010) v1(3500,3610) v1(3500,4210) v1(3500,4810) R6.2@3500,5360 R35.2@3500,5560 R34.2@3500,5660 R48.2@3500,5760 R37.2@3500,5860 v1(3500,5960) R47.2@3500,6060 R43.2@3500,6160 R39.2@3500,6260 R41.2@3500,6360 3500,7110 ; v1(4750,1810) v1(4750,2410) v1(4750,3010) v1(4750,3610) v1(4750,4210) v1(4750,4810) v1(4750,6610) 4750,7160 ; v1(5950,1810) v1(5950,2410) v1(5950,3010) v1(5950,3610) v1(5950,4210) v1(5950,4810) v1(5950,5410) v1(5950,6010) v1(5950,6610) 5950,7160 ; v1(7150,1810) v1(7150,2410) v1(7150,3010) v1(7150,3610) v1(7150,4210) v1(7150,4810) v1(7150,5110) v1(7150,5410) v1(7150,5710) v1(7150,6010) v1(7150,6310) v1(7150,6610) v1(7150,6910) 7150,7110 ; v1(8350,1810) v1(8350,2410) v1(8350,3010) v1(8350,3610) v1(8350,4210) v1(8350,5110) v1(8350,5710) v1(8350,6310) v1(8350,6910) 8350,7110 ; X1.1@9620.63,554.09 9550,624.72 v1(9550,1810) v1(9550,2410) v1(9550,3610) v1(9550,4210) 9550,6960 9350,7160 5950,7160 ; 2300,7160 2400,7160 4750,7160 ; 4750,7160 5950,7160
W\E\: J7.2 U21.3 U22.3 U23.3 U24.3 U25.3 U26.3 U27.3 U28.3 | length 8471.4
  Top Layer w20: J7.2@5300,4700 5300,4660 5350,4610 v1(8100,4610) ; U25.3@8050,6310 8100,6360 9200,6360 U26.3@9250,6310
  Bottom Layer w20: U27.3@8050,6910 8050,6860 8100,6810 8100,6410 8050,6360 U25.3@8050,6310 8050,6210 8100,6160 8100,5810 8050,5760 U23.3@8050,5710 8050,5560 8100,5510 8100,5210 8050,5160 U21.3@8050,5110 8050,5010 8100,4960 v1(8100,4610) ; U22.3@9250,5110 9250,5160 9300,5210 9300,5510 9250,5560 U24.3@9250,5710 9250,5760 9300,5810 9300,6110 9250,6160 U26.3@9250,6310 9250,6360 9300,6410 9300,6810 9250,6860 U28.3@9250,6910
W\R\: U14.12 U20.22 U47.5 U53.5 | length 8072.8
  Top Layer w20: U53.5@1800,3910 1950,3760 2050,3760 2150,3660 2150,3510 2300,3360 v1(5050,3360) ; v1(4650,4610) v1(5050,4610) ; v1(5050,4460) v1(5700,4460)
  Bottom Layer w20: U53.5@1800,3910 1950,4060 1950,4310 1850,4410 1850,4660 1787.69,4722.31 1787.69,4725.61 1750,4763.29 1750,4960 1800,5010 U47.5@1800,5110 ; U20.22@4600,5160 4650,5110 v1(4650,4610) ; v1(5050,3360) v1(5050,4460) v1(5050,4610) ; U14.12@5650,4210 5650,4410 v1(5700,4460)
W\R\B\U\F\: J11.3 U9.4 U13.12 U34.4 | length 4241.4
  Top Layer w20: v1(3050,4110) v1(4500,4110) J11.3@5550,4110
  Bottom Layer w20: v1(3050,4110) 3050,4410 3100,4460 U9.4@3100,4510 ; U13.12@4450,3010 4450,3060 4500,3110 v1(4500,4110) ; U34.4@5550,3910 J11.3@5550,4110
pads on no net: P1.11 P1.13 P1.15 U2.4 U2.8 U2.10 U3.4 U3.13 U4.4 U4.13 U5.4 U5.13 U6.4 U6.12 U6.13 U7.3 U7.4 U7.5 U7.12 U7.13 U7.14 U8.4 U8.10 U9.6 U9.9 U20.18 U20.23 U33.7 U33.10 U35.2 U35.3 U35.4 U35.5 U35.11 U35.12 U35.13 U38.5 U38.6 U38.10 U38.13 U38.14 U39.1 U39.14 U39.15 U41.5 U41.8 U42.1 U42.5 U42.7 U42.8 U42.10 U42.12 U42.13 U42.14 U43.19 U43.20 U43.21 U44.7 U44.9 U44.10 U44.11 U44.12 U44.13 U44.14 U46.5 U46.6 U46.7 U47.11 U47.12 U47.13 U50.1 U50.2 U50.3 U50.8 U50.9 U50.10 U50.11 U50.12 U50.13 U51.11 U51.12 U51.13 U52.2 U52.7 U52.8 U52.9 U52.10 U52.11 U52.12 U52.13 U52.14 U53.11 U53.12 U53.13 X2.2 X2.6 X8.1 X8.3 X8.8 X8.10 X8.12 X8.19

## Polygon pours and split planes (outlines as drawn)
GND on Bottom Layer "GND_L02_P038" (solid, pour order 38): 0,7310 10000,7310 10000,0 0,0
GND on Top Layer "GND_L01_P036" (solid, pour order 36): 0,7310 10000,7310 10000,0 0,0

## Keep-outs
Keep-Out Layer:
  lines w7.87: -10,-10 10010,-10 10010,7320 -10,7320 -10,-10

## Text inside footprints (layer, text, board x,y; h text height)
P1: Top Overlay "16" at 920,2240 h50; Top Overlay "15" at 920,2140 h50; Top Overlay "1" at 50,2140 h50; Top Overlay "2" at 50,2240 h50
X1: Mechanical 1 "Alert PCB fab to slot details" at 9381.81,25.98 h11.81 r90; Mechanical 1 "Assign keep-out area to slot" at 9362.13,25.98 h11.81 r90; Mechanical 1 "Mech 1 - Slot cut-out" at 9401.5,25.98 h11.81 r90; Mechanical 1 "Mech 2 - Clearance, move to internal plane if present" at 9421.19,25.98 h11.81 r90
X4: Mechanical 1 "Alert PCB fab to slot details" at 4744.49,-213.78 h11.81 r180; Mechanical 1 "Slot 1x1.9mm, PTH" at 4744.49,-194.09 h11.81 r180; Mechanical 1 "Assign keep-out area to slot" at 4744.49,-233.46 h11.81 r180; Mechanical 1 "Mech 1 - Slot cut-out" at 4744.49,-174.41 h11.81 r180; Mechanical 1 "Mech 2 - Clearance, move to internal plane if present" at 4744.49,-154.72 h11.81 r180
X5: Mechanical 1 "Alert PCB fab to slot details" at 3993.31,-218.5 h11.81 r180; Mechanical 1 "Slot 1x1.9mm, PTH" at 3993.31,-198.81 h11.81 r180; Mechanical 1 "Assign keep-out area to slot" at 3993.31,-238.19 h11.81 r180; Mechanical 1 "Mech 1 - Slot cut-out" at 3993.31,-179.13 h11.81 r180; Mechanical 1 "Mech 2 - Clearance, move to internal plane if present" at 3993.31,-159.44 h11.81 r180
X6: Mechanical 1 "Alert PCB fab to slot details" at 5365.67,-210.63 h11.81 r180; Mechanical 1 "Slot 1x1.9mm, PTH" at 5365.67,-190.94 h11.81 r180; Mechanical 1 "Assign keep-out area to slot" at 5365.67,-230.31 h11.81 r180; Mechanical 1 "Mech 1 - Slot cut-out" at 5365.67,-171.26 h11.81 r180; Mechanical 1 "Mech 2 - Clearance, move to internal plane if present" at 5365.67,-151.57 h11.81 r180